# Altium PCB PCB_PCB_ZX WiFi_2022-08-20_2022-11-14.pcbdoc
Units mil, origin at the board's own origin, x right, y up, seen from the top; angles counter-clockwise.
Board outline 2890 x 2515 mil, 2 copper layers (Top Layer, Bottom Layer); 38 components, 56 nets, 237 pads, 49 vias.
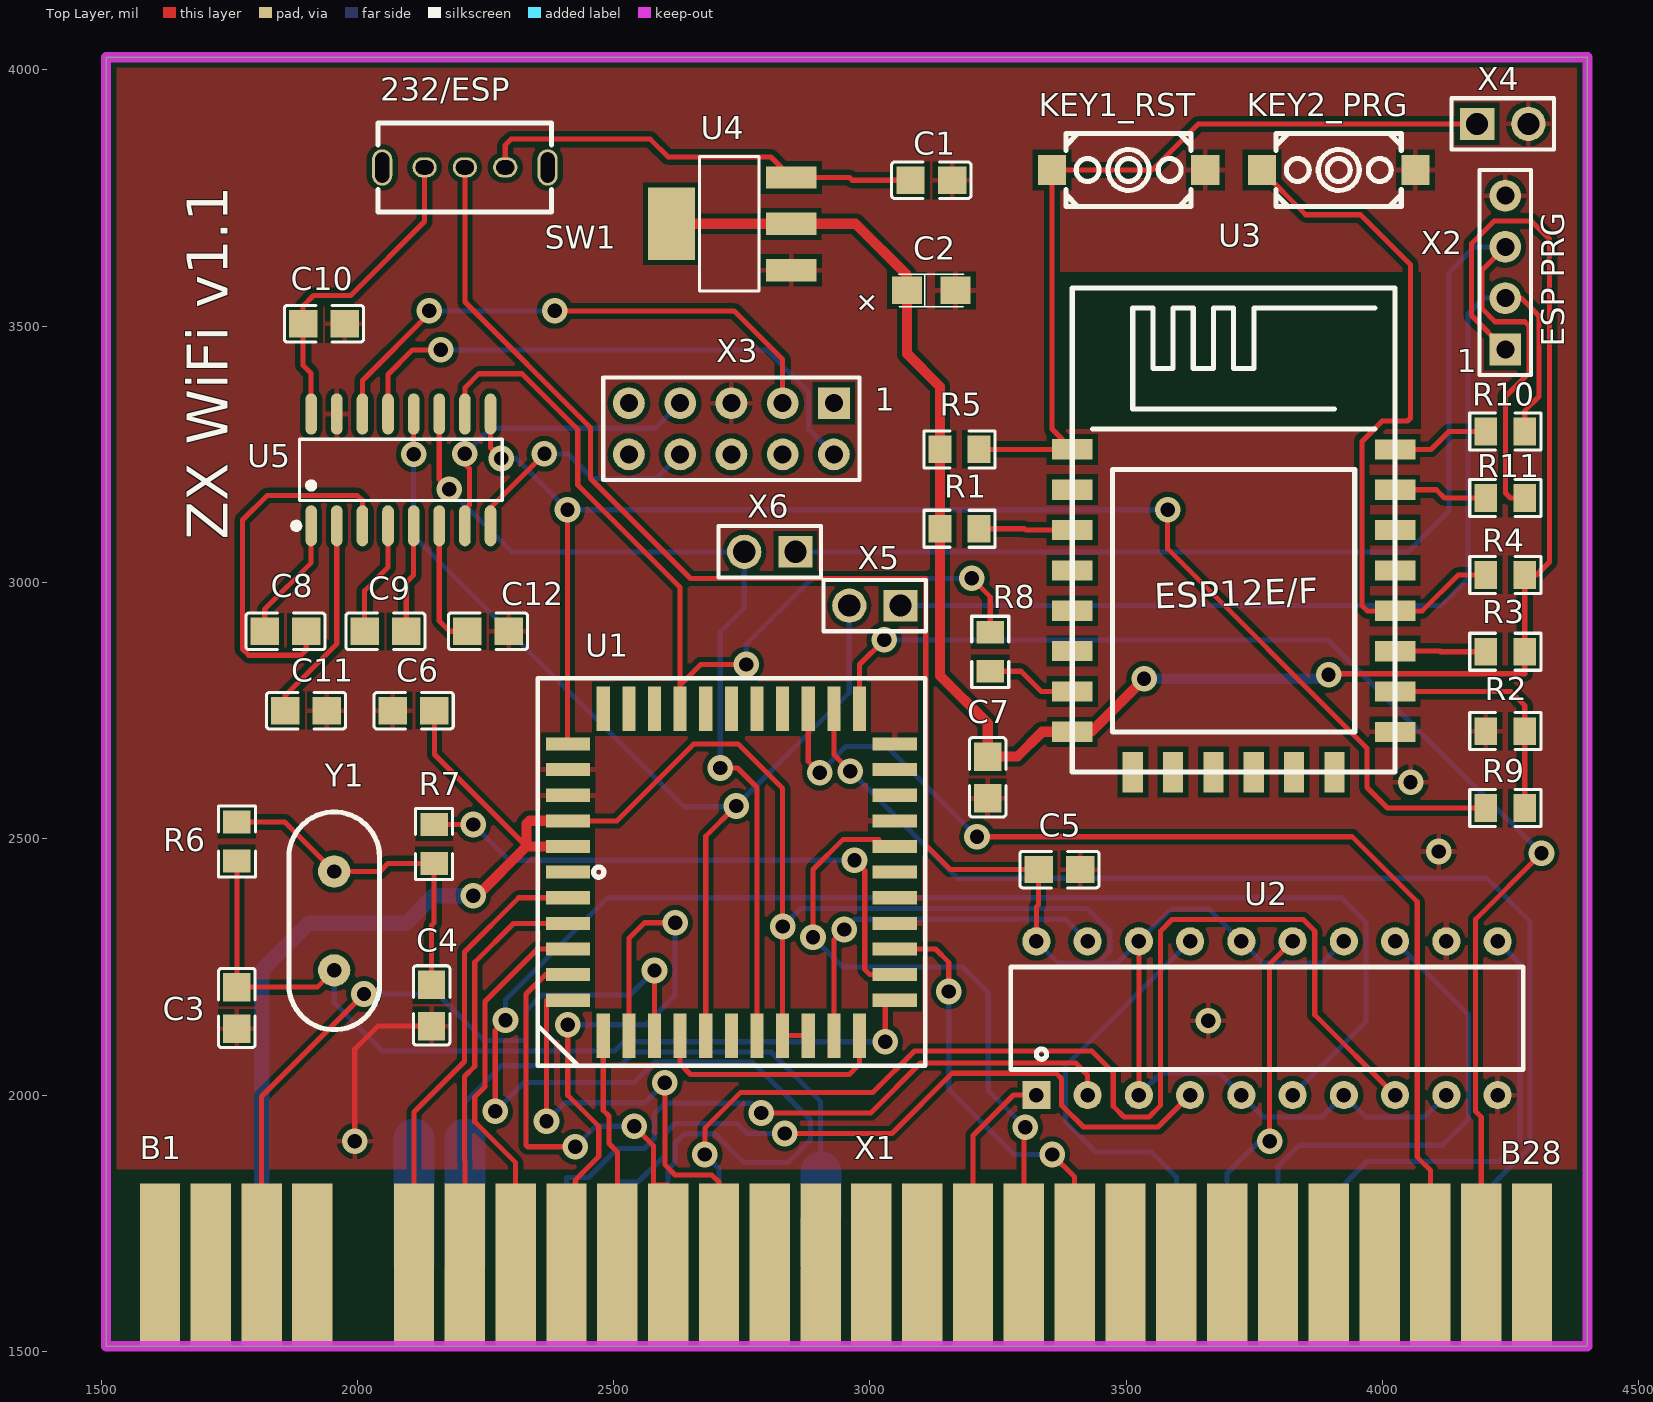
[diagram p0: Top Layer view]
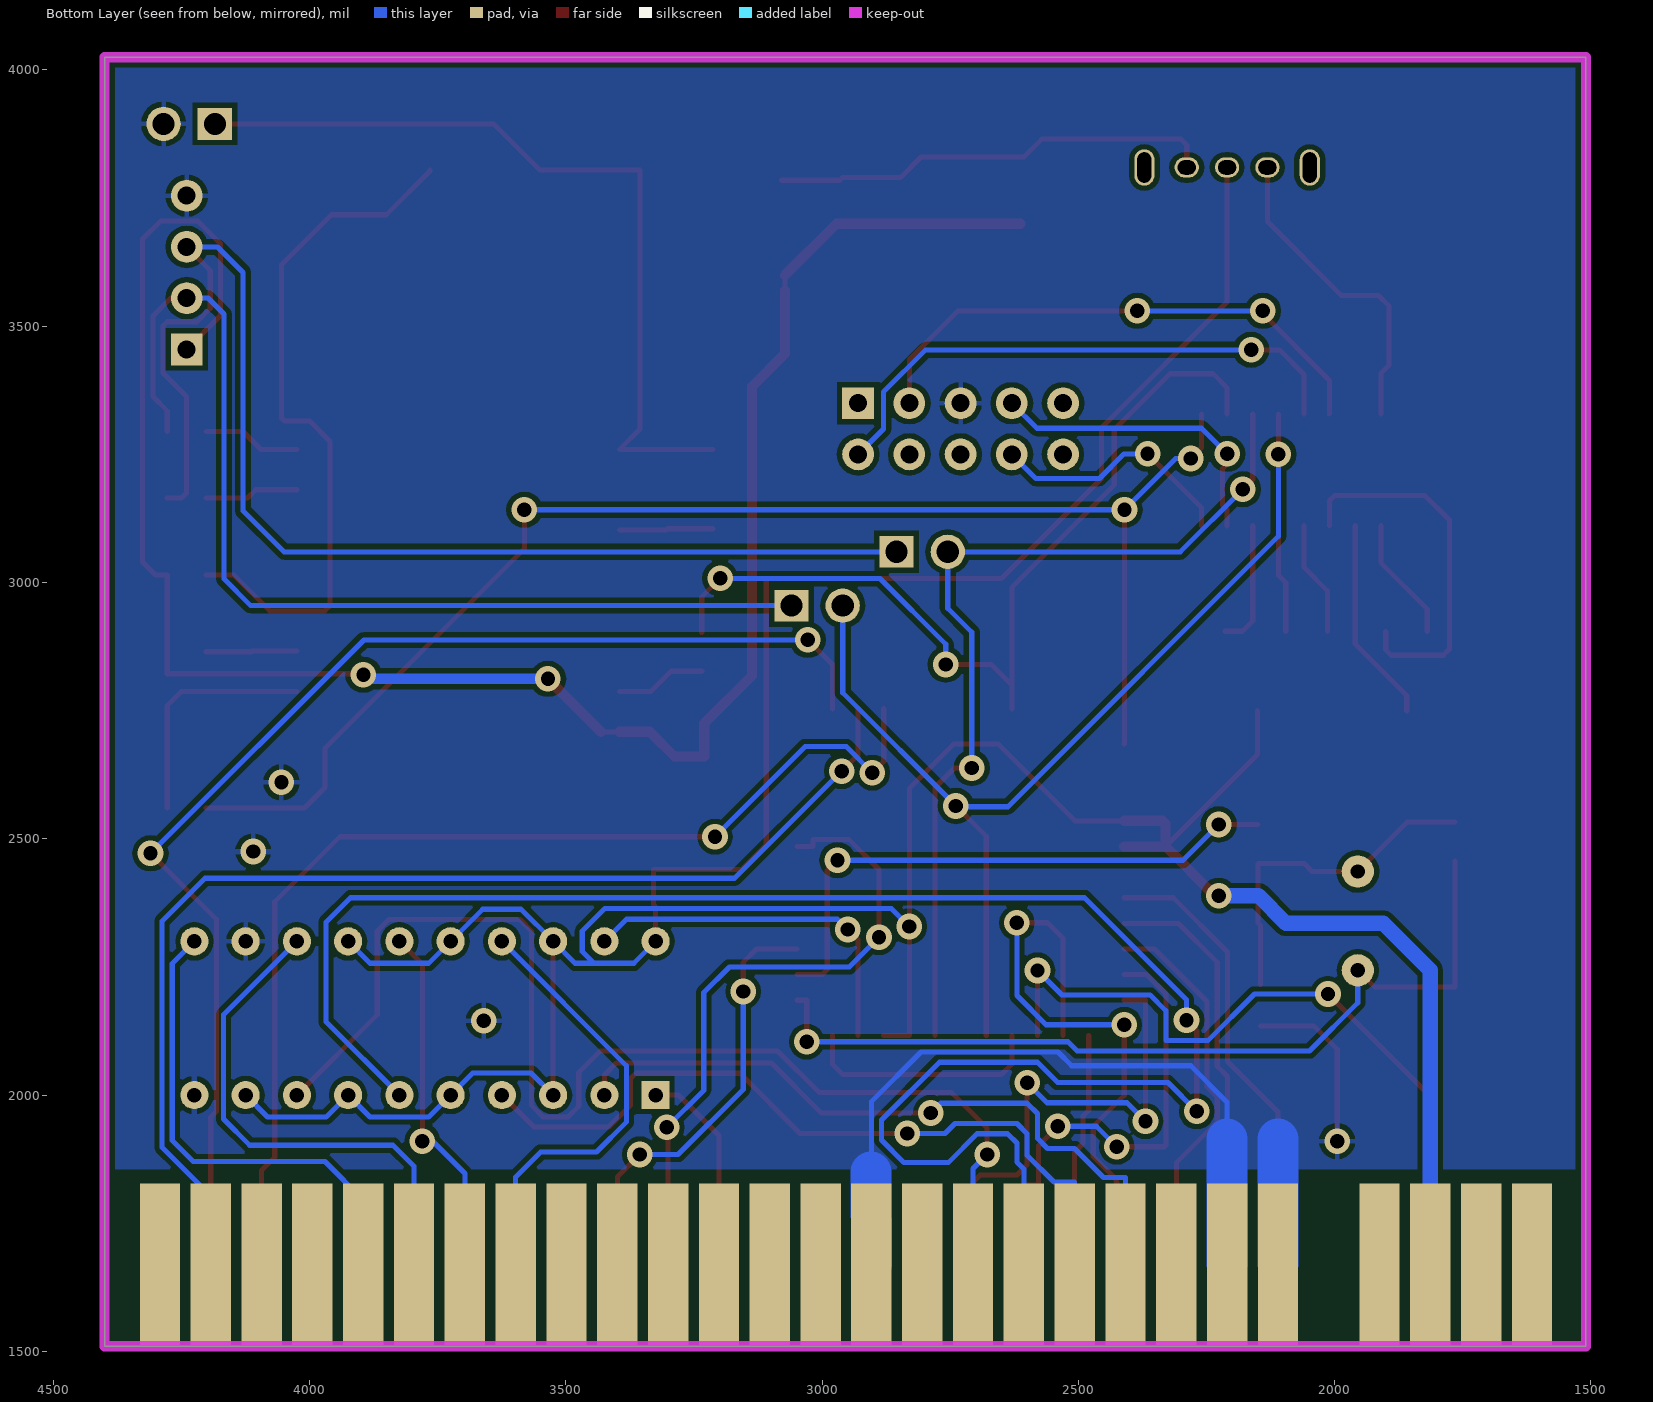
[diagram p1: Bottom Layer view, seen from below]

## Layer stack, top to bottom
Top Solder: solder mask 0.4, Solder Resist, Dk 3.5
Top Layer: signal copper 1.4
Dielectric1: dielectric 12.6, FR-4, Dk 4.8
Bottom Layer: signal copper 1.4
Bottom Solder: solder mask 0.4, Solder Resist, Dk 3.5

## Board outline
1509.84,1509.84 1509.84,4024.84 4399.84,4024.84 4399.84,1509.84

## Design rules (kind name [scope] priority, off if disabled: settings)
Clearance [All] p1: gap=10 ignorepadtopadclearanceinfootprint=FALSE except(0: Arc-Hole Track-Hole SMDPad-Hole THPad-Hole Via-Hole Fill-Hole Poly-Hole Region-Hole Text-Hole)
PolygonConnect [All] p1: connectstyle=Relief reliefconductorwidth=10 reliefentries=4 polygonreliefangle="90 Angle" airgapwidth=10
RoutingVias [All] p1: holewidth=28 width=50 viastyle="Through Hole" minholewidth=28 minwidth=50 maxholewidth=28 maxwidth=50
SolderMaskExpansion [All] p1: expansion=4
Width [All] p1: maxlimit=10 minlimit=10 preferedwidth=10
30 further rules are at their usual default settings.

## Components (designator, comment, footprint, x,y, rotation, side; value= is the part's Value field where it differs from the comment)
C1 "0.1u" C0805 3119.84,3784.84 r180 top
C2 "10u" CASE-A_3216 3119.84,3569.84 r0 top
C3 "22p" C0805 1764.84,2169.84 r90 top
C4 "47p" C0805 2144.84,2174.84 r90 top
C5 "0.1u" C0805 3369.84,2439.84 r180 top
C6 "0.1u" C0805 2109.84,2749.84 r0 top
C7 "0.1u" C0805 3229.84,2619.84 r90 top
C8 "0.1u" C0805 1859.84,2904.66 r0 top
C9 "0.1u" C0805 2054.84,2904.66 r180 top
C10 "0.1u" C0805 1934.84,3504.84 r180 top
C11 "0.1u" C0805 1899.84,2749.84 r0 top
C12 "0.1u" C0805 2254.84,2904.84 r0 top
KEY1_RST "K2-3.6×6.1_SMD" KEY-SMD_2P-L6.2-W3.6-LS8.0 3504.84,3804.84 r0 top
KEY2_PRG "K2-3.6×6.1_SMD" KEY-SMD_2P-L6.2-W3.6-LS8.0 3914.84,3804.84 r0 top
R1 "10k" R0805 3174.84,3104.84 r180 top
R2 "10k" R0805 4239.84,2709.84 r0 top
R3 "10k" R0805 4239.84,2864.84 r180 top
R4 "10k" R0805 4239.84,3014.84 r180 top
R5 "10k" R0805 3174.84,3259.84 r180 top
R6 "1M" R0805 1764.84,2494.84 r90 top
R7 "1.5k" R0805 2149.84,2489.84 r90 top
R8 "470" R0805 3234.84,2864.84 r90 top
R9 "47" R0805 4239.84,2559.84 r0 top
R10 "47" R0805 4239.84,3294.84 r0 top
R11 "470" R0805 4239.84,3164.84 r0 top
SW1 "SK-12D02-VG5" SW-TH_SK-12D02VG3 2209.84,3809.84 r180 top
U1 "TL16C550CFN" PLCC-44 2729.84,2434.84 r90 top
U2 "SN74LS688N" DIP20 3774.84,2149.84 r0 top
U3 "ESP12E" ESP12E/F 3714.84,3029.84 r0 top
U4 "LM1117-3.3 (SOT-223)" SOT-223-3_L6.5-W3.4-P2.30-LS7.0-BR 2729.84,3699.84 r0 top
U5 "MAX3232ESE" SOP-16_L9.9-W3.9-P1.27-LS6.0-BL 2084.84,3219.66 r0 top
X1 "ZX SPECTRUM CONNECTOR" "ZX SPECTRUM CONNECTOR" 1614.84,1669.84 r0 top
X2 "HDR-M-2.54_1x4" HDR-M-2.54_1X4 4239.84,3604.84 r90 top
X3 "HDR-M-2.54_2x5" HDR-M-2.54_2X5 2729.84,3299.84 r180 top
X4 "HDR-M-2.54_1x2" HDR-M-2.54_1X2 4234.84,3894.84 r0 top
X5 "HDR-M-2.54_1x2" HDR-M-2.54_1X2 3009.84,2954.84 r180 top
X6 "HDR-M-2.54_1x2" HDR-M-2.54_1X2 2804.84,3059.84 r180 top
Y1 "1.8432MHz" OSC-TH_L10.0-W4.5-P5.00 1954.84,2339.84 r0 top

## Footprints (in the part's own frame and the unit in brackets; to place one, negate y for a bottom-side part, rotate by r counter-clockwise, add the part's x,y. Pads: shape width x height; smd on the part's side, far side on the other; paste and mask are expansions set on the pad)
C0805 [mm]
  rect 1.41x1.35 smd: 1(-1.03,0) 2(1.03,0)
  silkscreen extent -1.96,-0.9 1.96,0.9
CASE-A_3216 [mm]
  rect 1.5x1.359 smd: 1(-1.2,0) 2(1.2,0)
  silkscreen extent -1.6,-0.8 1.6,0.8
DIP20 [mil]
  rect 55x55 hole 28: 1(-450,-150)
  round 55 hole 28: 2(-350,-150) 3(-250,-150) 4(-150,-150) 5(-50,-150) 6(50,-150) 7(150,-150) 8(250,-150) 9(350,-150) 10(450,-150) 11(450,150) 12(350,150) 13(250,150) 14(150,150) 15(50,150) 16(-50,150) 17(-150,150) 18(-250,150) 19(-350,150) 20(-450,150)
  silkscreen extent -500,-100 500,100
ESP12E/F [mm]
  rect 2x1 smd: 1(-8.128,5.842) 2(-8.128,3.842) 3(-8.128,1.843) 4(-8.128,-0.157) 5(-8.128,-2.159) 6(-8.128,-4.158) 7(-8.128,-6.157) 8(-8.127,-8.158) 15(7.873,-8.164) 16(7.874,-6.16) 17(7.875,-4.162) 18(7.874,-2.162) 19(7.874,-0.16) 20(7.874,1.839) 21(7.874,3.839) 22(7.874,5.839)
  rect 1x2 smd: 9(-5.126,-10.159) 10(-3.128,-10.157) 11(-1.13,-10.159) 12(0.871,-10.159) 13(2.87,-10.159) 14(4.87,-10.159)
  silkscreen extent -8.13,-10.16 7.87,13.84
HDR-M-2.54_1X2 [mm]
  rect 1.7x1.575 hole 1.1: 1(-1.27,0)
  round 1.7 hole 1.1: 2(1.27,0)
  silkscreen extent -2.54,-1.27 2.54,1.27
HDR-M-2.54_1X4 [mil]
  rect 62x62 hole 35: 1(-150,0)
  round 62 hole 35: 2(-50,0) 3(50,0) 4(150,0)
  silkscreen extent -200,-50 200,50
HDR-M-2.54_2X5 [mil]
  rect 62x62 hole 35: 1(-200,-50)
  round 62 hole 35: 2(-200,50) 3(-100,-50) 4(-100,50) 5(0,-50) 6(0,50) 7(100,-50) 8(100,50) 9(200,-50) 10(200,50)
  silkscreen extent -250,-100 250,100
KEY-SMD_2P-L6.2-W3.6-LS8.0 [mm]
  rect 1.4x1.5 smd: 1(-3.8,0) 2(3.8,0)
  silkscreen extent -3.1,-1.8 3.1,1.8
OSC-TH_L10.0-W4.5-P5.00 [mm]
  round 1.6 hole 0.7: 1(0,2.45) 2(0,-2.45)
  silkscreen extent -2.25,-5.39 2.25,5.39
PLCC-44 [mil]
  rect 25.6x86.6 smd: 1(0,318.9) 2(-50,318.9) 3(-100,318.9) 4(-150,318.9) 5(-200,318.9) 6(-250,318.9) 18(-250,-318.9) 19(-200,-318.9) 20(-150,-318.9) 21(-100,-318.9) 22(-50,-318.9) 23(0,-318.9) 24(50,-318.9) 25(100,-318.9) 26(150,-318.9) 27(200,-318.9) 28(250,-318.9) 40(250,318.9) 41(200,318.9) 42(150,318.9) 43(100,318.9) 44(50,318.9)
  rect 86.6x25.6 smd: 7(-318.9,250) 8(-318.9,200) 9(-318.9,150) 10(-318.9,100) 11(-318.9,50) 12(-318.9,0) 13(-318.9,-50) 14(-318.9,-100) 15(-318.9,-150) 16(-318.9,-200) 17(-318.9,-250) 29(318.9,-250) 30(318.9,-200) 31(318.9,-150) 32(318.9,-100) 33(318.9,-50) 34(318.9,0) 35(318.9,50) 36(318.9,100) 37(318.9,150) 38(318.9,200) 39(318.9,250)
  silkscreen extent -378,-378 378,378
R0805 [mil]
  rect 44.59x54.21 smd: 1(-38.04,0) 2(38.04,0)
  silkscreen extent -69,-36 69,36
SOP-16_L9.9-W3.9-P1.27-LS6.0-BL [mil]
  oval 22.6x80.24 smd: 1(-175,-109.02) 2(-125,-109.02) 3(-75,-109.02) 4(-25,-109.02) 5(25,-109.02) 6(75,-109.02) 7(125,-109.02) 8(175,-109.02) 9(175,109.02) 10(125,109.02) 11(75,109.02) 12(25,109.02) 13(-25,109.02) 14(-75,109.02) 15(-125,109.02) 16(-175,109.02)
  silkscreen extent -210,-115 198,60
SOT-223-3_L6.5-W3.4-P2.30-LS7.0-BR [mm]
  rect 2.5x1.1 smd: 1(2.97,-2.3) 2(2.97,0) 3(2.97,2.3)
  rect 2.34x3.6 smd: 4(-2.97,0)
  silkscreen extent -1.57,-3.33 1.37,3.33
SW-TH_SK-12D02VG3 [mm]
  oval 1.2x1 hole 0.7 slot 0.9 at 0 deg: 1(-2,0) 2(0,0) 3(2,0)
  oval 1x1.8 hole 0.7 slot 1.5 at 90 deg: 4(4.1,0) 5(-4.1,0)
  silkscreen extent -4.3,-2.2 4.3,2.2
"ZX SPECTRUM CONNECTOR" [mm]
  rect 2x8 smd far side: A1(0.001,0) A2(2.519,0) A3(5.038,0) A4(7.556,0) A6(12.593,0) A7(15.112,0) A8(17.63,0) A9(20.149,0) A10(22.667,0) A11(25.186,0) A12(27.704,0) A13(30.223,0) A14(32.742,0) A15(35.26,0) A16(37.778,0) A17(40.297,0) A18(42.815,0) A19(45.334,0) A20(47.852,0) A21(50.371,0) A22(52.889,0) A23(55.408,0) A24(57.926,0) A25(60.444,0) A26(62.963,0) A27(65.482,0) A28(68,0)
  rect 2x8 smd: B1(0,0) B2(2.519,0) B3(5.037,0) B4(7.556,0) B6(12.593,0) B7(15.111,0) B8(17.63,0) B9(20.148,0) B10(22.667,0) B11(25.185,0) B12(27.704,0) B13(30.222,0) B14(32.741,0) B15(35.259,0) B16(37.778,0) B17(40.296,0) B18(42.815,0) B19(45.333,0) B20(47.852,0) B21(50.37,0) B22(52.889,0) B23(55.407,0) B24(57.926,0) B25(60.444,0) B26(62.963,0) B27(65.481,0) B28(68,0)

## Part data
KEY1_RST KEY2_PRG: library part K2-3.6?6.1_SMD

## Via types
v1: diameter 50, hole 28, Top Layer to Bottom Layer, 46 vias
v2: diameter 50, hole 28, Top Layer to Bottom Layer, tented both sides, 3 vias

## Nets (pads, with @x,y where several pads share a name; then routed paths per layer and width w, separated by ;. In a path a pad name is that pad's centre, name@x,y a point inside that pad or via, vN(x,y) a via of type N, cw(c..) or ccw(c..) an arc to the next point about the centre after c; other vN are vias at no path point)
+3.3V: C2.1 C7.2 R1.2 R3.1 R4.1 R5.2 U3.8 U4.2 U4.4 X2.1 | length 3928.4
  Top Layer w10: C2.1 3072.6,3599.24 ; U3.8 U3.8@3431.64,2708.64 ; v1(3535,2812) v1@3541,2818 ; v1(3895,2820) 3897.03,2822.03 4277.86,2822.03 ; X2.1 4173.84,3520.84 4173.84,3660.84 4218,3705 4291,3705 4325.84,3670.16 4325.84,3039.84 4300.84,3014.84 R4.1 R3.1 4277.88,2822
  Top Layer w20: U4.4 U4.2 2972,3699.84 3072.6,3599.24 ; C2.1 3072.6,3446.2 3136.8,3382 R5.2 R1.2 3136.8,2818.04 3229.84,2725 C7.2 3288,2660.39 3336.25,2708.64 U3.8 ; U3.8@3431.64,2708.64 v1(3535,2812)
  Bottom Layer w10: v1@3887,2812 v1(3895,2820)
  Bottom Layer w20: v1(3535,2812) v1@3887,2812
+5V: C5.2 C6.2 SW1.2 U1.14 U1.15 U1.43 U1.44 U2.3 U2.5 U2.7 U2.9 U2.14 U2.16 U2.18 U2.20 X1.A3 | length 7605.8
  Top Layer w10: C6.2 2150.39,2664.61 2330,2485 2330,2484.84 ; SW1.2 2209.83,3547.17 2455,3302 2455,3203 2650,3008 3109,3008 3109,2487.84 3157,2439.84 C5.2 3329.29,2371.45 3324.84,2367 U2.20 ; U1.43@2410.78,2535 U1.43 2506,2534.84 2656.16,2685 2743,2685 2829.84,2598.16 v1(2829.84,2328.84) U1.14 U1.15 ; U2.3 U2.18
  Top Layer w20: v1(2226,2389) 2234,2389 2330,2485 2330,2529.14 2335.86,2535 U1.43@2410.78,2535 ; 2330,2484.84 U1.44
  Bottom Layer w10: v1(2829.84,2328.84) 2865,2364 3424,2364 3468,2320 3468,2280 3445,2257 ; U2.20 3367.68,2257 3445,2257 ; U2.3 3568,2043 3681.68,2043 U2.5 3767.68,1957 3882,1957 U2.7 3967.68,1957 4082,1957 U2.9 ; U2.14 3882,2257 3767.68,2257 U2.16 3662.34,2362.34 3587.34,2362.34 U2.18 3482,2257 3445,2257
  Bottom Layer w30: X1.A3 1813.19,2243.19 1905,2335 2095,2335 2149,2389 v1(2226,2389)
+5V_ESP: C1.2 SW1.1 U4.3 | length 872.4
  Top Layer w10: SW1.1 2288.57,3853.57 2300,3865 2571.39,3865 2606.39,3830 2807.16,3830 U4.3 2960,3790.39 2965.55,3784.84 C1.2
A0: U2.2 X1.A9 | length 1371.5
  Top Layer w10: v1(2788,1965) 3001.51,1965 3099.01,2062.5 3401.5,2062.5 3424.84,2039.16 U2.2
  Bottom Layer w10: X1.A9 2408.1,1839 2451.04,1839 2507.46,1895.42 2560,1895.42 2580,1915.42 2580,1963.75 2600.25,1984 2769,1984 v1(2788,1965)
A1: U2.4 X1.A10 | length 1506.4
  Top Layer w10: v1(2834,1925) 3043,1925 3160.5,2042.5 3363.5,2042.5 3374,2032 3374,1980 3416.66,1937.34 3562.34,1937.34 U2.4
  Bottom Layer w10: X1.A10 2507.26,1830 2547.6,1830 2600,1882.4 2600,1924.43 2620,1944.43 2740.57,1944.43 2760,1925 v1(2834,1925)
A2: U2.6 X1.A11 | length 3699.8
  Top Layer w10: v1(2269,1968) 2269,2126 v1(2289,2146)
  Bottom Layer w10: v1(2269,1968) 2325.26,2024.26 2540.26,2024.26 2580,2064 2771,2064 2884,1951 2884,1912 2840,1868 2754,1868 2697.57,1924.43 2638.09,1924.43 2620,1906.34 2620,1869 2606.41,1855.41 X1.A11 ; v1(2289,2146) 2289,2186 2488,2385 3920,2385 3968,2337 3968,2143 U2.6
A3: U2.8 X1.A12 | length 2374.2
  Top Layer w10: v1(2678,1884) 2678,1935.1 2748.15,2005.25 3006.25,2005.25 3087,2086 3433,2086 3475,2044 3475,1978 3495.66,1957.34 3544.68,1957.34 3567.34,1980 3567.34,2320 3589.68,2342.34 3845.66,2342.34 3868,2320 3868,2156.68 U2.8
  Bottom Layer w10: v1(2678,1884) 2705.56,1856.44 X1.A12
A4: U2.11 X1.A24 | length 952.8
  Bottom Layer w10: X1.A24 3895.39,1795.39 3970,1870 4227,1870 4268,1911 4268,2256.68 U2.11
A5: U2.13 X1.A23 | length 1007.2
  Bottom Layer w10: X1.A23 3796.25,1861 3837.25,1902 4117,1902 4168,1953 4168,2156.68 U2.13
A6: U2.15 X1.A22 | length 694.6
  Top Layer w10: v1(3780,1910) 3780,2255 U2.15
  Bottom Layer w10: X1.A22 3697.09,1847.09 3760,1910 v1(3780,1910)
A7: U2.17 X1.A21 | length 883.8
  Bottom Layer w10: X1.A21 3597.94,1840 3548.94,1889 3440,1889 3382,1947 3382,2057 U2.17
A8: U1.31 X1.B26 | length 2164.4
  Top Layer w10: U1.31 2879.84,2651.16 v1(2902,2629) ; v1(3209,2504) 3941,2504 4068,2377 4068,1878.7 4093.7,1853 X1.B26
  Bottom Layer w10: v1(2902,2629) 2953,2680 3033,2680 v1(3209,2504)
A9: U1.30 X1.A27 | length 2291.1
  Top Layer w10: U1.30 2929.84,2664 v1(2962,2631.84)
  Bottom Layer w10: v1(2962,2631.84) 3170.84,2423 4204,2423 4288,2339 4288,1898 4192.86,1802.86 X1.A27
A10: U1.29 X1.B27 | length 2468.6
  Top Layer w10: U1.29 2979.84,2839.84 v1(3028,2888) ; X1.B27 4192.85,1957 4182,1967.85 4182,2343 v1(4310.5,2471.5)
  Bottom Layer w10: v1(3028,2888) 3894,2888 v1(4310.5,2471.5)
CTS: U5.8 X3.8 | length 488
  Top Layer w10: U5.8 2259.84,3145.84 v1(2365,3251)
  Bottom Layer w10: v1(2365,3251) 2411,3251 2459,3203 2583,3203 X3.8
CTS_TTL: R9.1 U1.40 U5.9 | length 2846.5
  Top Layer w10: U5.9 2259.84,3263.16 v1(2281,3242) ; v1(2410,3142) 2410,2684.84 U1.40 ; v1(3581,3142) 3581,3065.8 3970,2676.8 3970,2600 4010.16,2559.84 R9.1
  Bottom Layer w10: v1(2281,3242) 2310,3242 v1(2410,3142) v1(3581,3142)
D0: U1.2 X1.B6 | length 895.7
  Top Layer w10: X1.B6 2110.61,1967 2209,2065.39 2209,2279.04 2314.8,2384.84 U1.2
D1: U1.3 X1.B7 | length 811.1
  Top Layer w10: X1.B7 2209.77,1873 2209,1873.77 2209,2036 2229,2056 2229,2259.04 2304.8,2334.84 U1.3
D2: U1.4 X1.B8 | length 758.4
  Top Layer w10: X1.B8 2308.92,1868 2229,1947.92 2229,1996 2249,2016 2249,2182.47 2351.37,2284.84 U1.4
D3: U1.5 X1.B11 | length 934.7
  Top Layer w10: U1.5 2366.84,2234.84 2329,2197 2329,1902 2332,1899 v1(2424.94,1899) ; v1(2540,1939) 2578,1901 2578,1824.42 2606.39,1824.42 X1.B11
  Bottom Layer w10: v1(2424.94,1899) 2464.94,1939 v1(2540,1939)
D4: U1.6 X1.B12 | length 979.6
  Top Layer w10: v1(2369,1949) 2369,2184.84 U1.6 ; v1(2600,2024) 2600,1864 2620,1844 2691.54,1844 2705.54,1830 X1.B12
  Bottom Layer w10: v1(2369,1949) 2405,1985 2561,1985 v1(2600,2024)
D5: U1.7 X1.B10 | length 457.4
  Top Layer w10: U1.7 2479.84,1970.19 2491.04,1959 2491.04,1905.19 2507.23,1889 X1.B10
D6: U1.8 X1.B9 | length 1179.4
  Top Layer w10: X1.B9 2426.19,1835.15 2471.04,1880 2471.04,1939 2410.52,1999.52 v1(2410.52,2137) ; U1.8 2529.84,2305.84 2560,2336 v1(2620,2336)
  Bottom Layer w10: v1(2410.52,2137) 2563,2137 2620,2194 v1(2620,2336)
D7: U1.9 X1.B3 | length 1432.3
  Top Layer w10: X1.B3 1813.15,1997.15 v1(2013,2197) ; U1.9 v1(2579.84,2243)
  Bottom Layer w10: v1(2013,2197) 2156.39,2197 2247.39,2106 2329,2106 2329.39,2106.39 2329.39,2164.39 2360,2195 2531.84,2195 v1(2579.84,2243)
GND: C1.1 C2.2 C3.1 C4.1 C5.1 C6.1 C7.1 C10.1 C11.2 C12.2 KEY1_RST.2 KEY2_PRG.2 R2.1 U1.21 U1.22 U1.25 U1.28 U1.41 U1.42 U2.10 U2.12 U3.15 U4.1 U5.15 X1.A6 X1.A7 X1.A14 X2.4 X3.5 X4.2 | length 2426.2
  Top Layer w10: v1(1995,1910) 1995,2089.29 2040,2134.29 C4.1
  Bottom Layer w10: 2110,1915 2110.65,1914.35 ; X1.A7 2209.8,1986.04 2280.76,2057 2513,2057 2540,2084 2807,2084 2904,1987 2904,1875 2903.88,1874.88 X1.A14
  Bottom Layer w80: X1.A6 2110.65,1914.35 ; X1.A7 2209.8,1914.35 ; X1.A14 2905,1850
  other v2: 3660,2145 4110,2475 4055,2610
IORQ: U2.1 X1.B17 | length 407.4
  Top Layer w10: X1.B17 3201.31,1921.15 3280,1999.84 U2.1
NetC3_2: C3.2 R6.1 U1.18 Y1.2 | length 1734.6
  Top Layer w10: R6.1 C3.2 1921.85,2210.39 Y1.2 ; v1(3030,2104) 3030,2184.84 U1.18
  Bottom Layer w10: Y1.2 1954.84,2180 2048.84,2086 2502.25,2086 2520.25,2104 v1(3030,2104)
NetC4_2: C4.2 R6.2 R7.1 Y1.1 | length 669.9
  Top Layer w10: R6.2 1858.26,2532.88 Y1.1 2044,2436.3 2059.5,2451.8 R7.1 2149.84,2336 2144.84,2331 C4.2
NetC8_1: C8.1 U5.1 | length 243.5
  Top Layer w10: C8.1 1819.29,2948.16 1909.84,3038.71 U5.1
NetC8_2: C8.2 U5.3 | length 729.2
  Top Layer w10: C8.2 1900.39,2868.39 1890,2858 1788,2858 1776,2870 1776,3122 1824,3170 1999.84,3170 2009.84,3160 U5.3
NetC9_1: C9.1 U5.5 | length 212
  Top Layer w10: C9.1 2095.39,3000 2109.84,3014.45 U5.5
NetC9_2: C9.2 U5.4 | length 224.9
  Top Layer w10: C9.2 2014.29,2984 2059.84,3029.55 U5.4
NetC10_2: C10.2 SW1.3 U5.16 | length 628.3
  Top Layer w10: U5.16 1909.84,3408 1894.29,3423.55 C10.2 1894.29,3540 1914.29,3560 1987,3560 2131.11,3704.11 SW1.3
NetC11_1: C11.1 U5.2 | length 402.5
  Top Layer w10: C11.1 1859.29,2779.45 1959.84,2880 U5.2
NetC12_1: C12.1 U5.6 | length 248.4
  Top Layer w10: U5.6 2159.84,2925 2180,2904.84 C12.1
NetKEY1_RST_1: KEY1_RST.1 R5.1 U3.1 X4.1 | length 1610.2
  Top Layer w10: R5.1 U3.1 3355.24,3299.45 KEY1_RST.1 3550.84,3804.84 3640.84,3894.84 X4.1
NetKEY2_PRG_1: KEY2_PRG.1 R4.2 U3.18 | length 1375.8
  Top Layer w10: KEY2_PRG.1 3765.24,3802.87 3850.57,3717.54 3957.46,3717.54 4055,3620 4055,3320.86 4049.14,3315 3999.83,3315 3960,3275.17 3960,2955 3970.26,2944.74 U3.18 4078,2944.74 4148.1,3014.84 R4.2
NetR1_1: R1.1 U3.3 | length 183
  Top Layer w10: R1.1 3302,3104.84 3304.45,3102.39 U3.3
NetR2_2: R2.2 R9.2 U3.16 | length 464.5
  Top Layer w10: U3.16 4250.54,2787.34 4277.88,2760 R2.2 R9.2
NetR3_2: R3.2 U3.17 | length 177.4
  Top Layer w10: U3.17 4112,2865.99 4113.15,2864.84 R3.2
NetR7_2: R7.2 U1.19 | length 1133.4
  Top Layer w10: R7.2 v1(2226.12,2527.88) ; v1(2970,2458) 2990,2438 2990,2244.84 3000,2234.84 U1.19
  Bottom Layer w10: v1(2226.12,2527.88) 2296,2458 v1(2970,2458)
NetR8_1: R8.1 U3.7 | length 176.3
  Top Layer w10: R8.1 3295,2826.8 3334.36,2787.44 U3.7
NetR10_1: R10.1 U3.22 | length 191.5
  Top Layer w10: U3.22 4095,3259.74 4130.1,3294.84 R10.1
NetR11_1: R11.1 U3.21 | length 183.6
  Top Layer w10: U3.21 4105,3180.99 4121.15,3164.84 R11.1
NetU1_10: U1.10 U1.17 | length 478.5
  Top Layer w10: U1.10 2629.84,2060 2649.84,2040 2959.84,2040 2979.84,2060 U1.17
NetU1_16: U1.16 U2.19 | length 716.5
  Top Layer w10: U1.16 2929.84,2303 v1(2949.84,2323)
  Bottom Layer w10: v1(2949.84,2323) 2969.84,2343 3381.68,2343 U2.19
RD: U1.24 X1.B18 | length 1277.9
  Top Layer w10: v1(2889,2308) 2889,2440 2947.87,2498.87 3017.68,2498.87 3017.68,2484.84 U1.24 ; X1.B18 3300.46,1934.46 v1(3303,1937)
  Bottom Layer w10: v1(2889,2308) 2947,2250 3181,2250 3231,2200 3231,2009 v1(3303,1937)
RTS: U5.7 X3.7 | length 608.9
  Top Layer w10: U5.7 2209.84,3142 2219,3151.16 2219,3222 2209.84,3231.16 v1(2209.84,3251)
  Bottom Layer w10: v1(2209.84,3251) 2259.84,3301 2581,3301 X3.7
RTS_TTL: R8.2 U1.36 U5.10 | length 1753.7
  Top Layer w10: U5.10 2209.84,3380 2237.02,3407.18 2321.21,3407.18 2430,3298.39 2430,3190 2629.84,2990.16 2629.84,2800 ; U1.36 2629.84,2800 ; v1(2758.84,2840) 2669.84,2840 2629.84,2800 ; v1(3198.84,3008) 3234.84,2972 R8.2
  Bottom Layer w10: v1(2758.84,2840) 2758.84,2879.68 2887.16,3008 v1(3198.84,3008)
RXD: U5.13 X3.2 | length 1094.1
  Top Layer w10: U5.13 2059.84,3406 2107.84,3454 v1(2163,3454)
  Bottom Layer w10: v1(2163,3454) 2798,3454 2880,3372 2880,3299.68 X3.2
RXD_ESP: R11.2 X2.3 X6.1 | length 2560.1
  Top Layer w10: X2.3 4193.84,3608.84 4193.84,3535 4220,3508.84 4278,3508.84 4285.84,3501 4285.84,3408.84 4240,3363 4240,3174.84 4250,3164.84 R11.2
  Bottom Layer w10: X6.1 4049.84,3059.84 4130,3140 4130,3605 4179.84,3654.84 X2.3 X2.3@4239.84,3630.73
RXD_TTL: U1.11 U5.12 X5.2 | length 2041.7
  Top Layer w10: v1(2109.84,3250) U5.12 ; U1.11 2679.84,2504.84 v1(2739,2564)
  Bottom Layer w10: v1(2109.84,3250) 2109.84,3090.16 2637.5,2562.5 2737.5,2562.5 v1(2739,2564) 2959.84,2784.84 X5.2
TXD: U5.14 X3.3 | length 1068
  Top Layer w10: U5.14 2010.07,3328.9 2010.07,3394.22 v1@2142.92,3527.08 ; v1(2385,3530) 2735,3530 2829.84,3435.16 X3.3
  Bottom Layer w10: v1(2140,3530) v1(2385,3530)
TXD_ESP: R10.2 X2.2 X5.1 | length 2048.2
  Top Layer w10: X2.2 4271,3554.84 4305.84,3520 4305.84,3362.84 4277.88,3334.88 R10.2
  Bottom Layer w10: X5.1 4114.84,2954.84 4167.32,3007.32 4167.32,3523.67 4198.49,3554.84 X2.2
TXD_TTL: U1.13 U5.11 X6.2 | length 1793.9
  Top Layer w10: U5.11 2159.84,3201.16 v1(2179,3182) ; v1(2708,2638) 2741.84,2638 2779.84,2600 U1.13
  Bottom Layer w10: v1(2179,3182) 2301.16,3059.84 X6.2 2754.84,2949.68 2708,2902.84 v1(2708,2638)
WR: U1.20 X1.B19 | length 850.5
  Top Layer w10: U1.20 3128,2284.84 3154,2258.84 v1(3154,2202) ; v1(3355.62,1884) 3399.62,1840 X1.B19
  Bottom Layer w10: v1(3154,2202) 3154,2011 3281,1884 v1(3355.62,1884)
pads on no net: SW1.4 SW1.5 U1.1 U1.12 U1.23 U1.26 U1.27 U1.32 U1.33 U1.34 U1.35 U1.37 U1.38 U1.39 U3.2 U3.4 U3.5 U3.6 U3.9 U3.10 U3.11 U3.12 U3.13 U3.14 U3.19 U3.20 X1.A1 X1.A2 X1.A4 X1.A8 X1.A13 X1.A15 X1.A16 X1.A17 X1.A18 X1.A19 X1.A20 X1.A25 X1.A26 X1.A28 X1.B1 X1.B2 X1.B4 X1.B13 X1.B14 X1.B15 X1.B16 X1.B20 X1.B21 X1.B22 X1.B23 X1.B24 X1.B25 X1.B28 X3.1 X3.4 X3.6 X3.9 X3.10

## Polygon pours and split planes (outlines as drawn)
GND on Bottom Layer "GND_L02_P001" (solid, pour order 1): 1509.84,4024.84 1510,4025 4390,4025 4390,1855 1510,1855
GND on Top Layer "GND_L01_P000" (solid, pour order 0): 1509.84,4024.84 4399.84,4024.84 4399.84,1855.16 4400,1855 1515,1855 1515,1854.18 1510.09,1849.27

## Keep-outs
Keep-Out Layer:
  lines w19.68: 1509.84,3619.84 1509.84,1509.84 ; 1509.84,1509.84 1509.84,4024.84 4399.84,4024.84 4399.84,1509.84 1509.84,1509.84

## Other copper
Top Layer:
  pour cut-out: 4075,3605 4075,3300 3355,3300 3355,3605

## Silkscreen, mask and mechanical layers (free items; w line width, h text height)
Top Overlay:
  text "232/ESP" at 2045,3940 h45
  text "+" at 3025.75,3540.75 h45 r135
  text "ESP PRG" at 4355,3460 h45 r90
  text "1" at 4145,3410 h45
  text "1" at 3010,3335 h45
  text "ZX WiFi v1.1" at 1747,3083 h80 r90
  text "B1" at 1575,1875 h45
  text "B28" at 4230,1865 h45

## Text inside footprints (layer, text, board x,y; h text height)
U3: Top Overlay "ESP12E/F" at 3555.72,2948.46 h50 r2